# Altium PCB ind_8700.PcbDoc
Units mm, origin at the board's own origin, x right, y up, seen from the top; angles counter-clockwise.
Board outline 67 x 42 mm, 2 copper layers (Top, Bottom); 37 components, 38 nets, 106 pads, 9 vias.
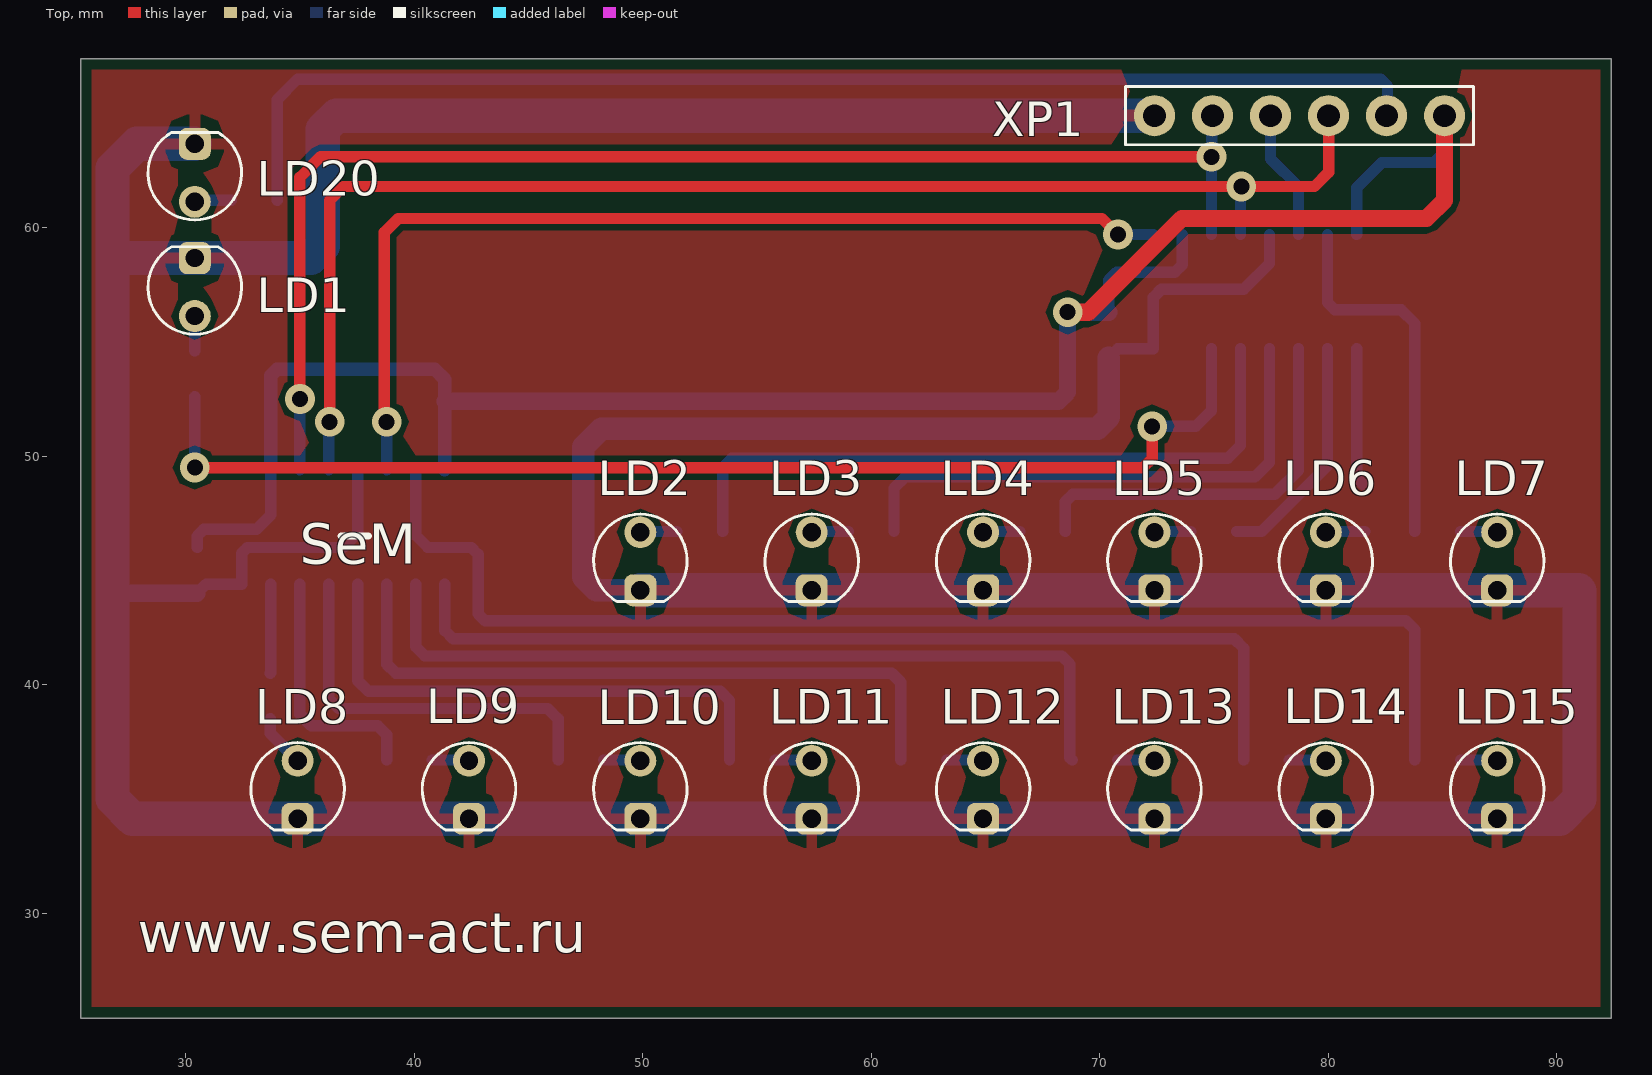
[diagram p0: Top view]
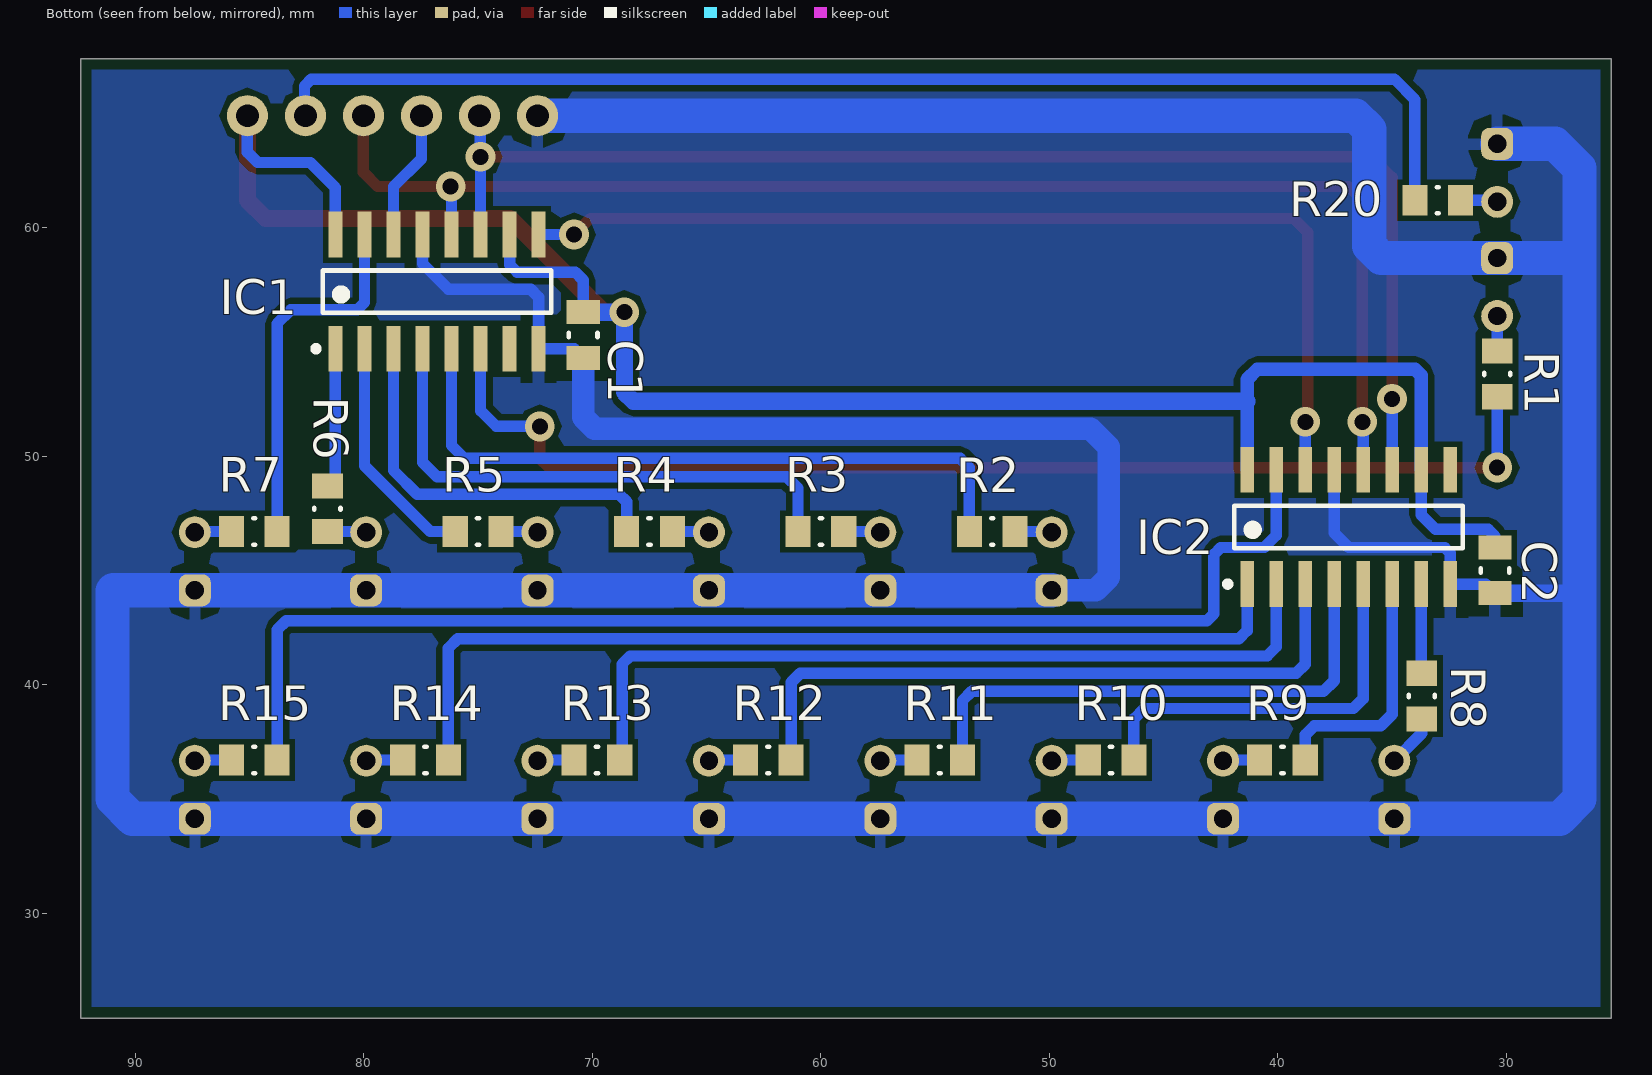
[diagram p1: Bottom view, seen from below]

## Layer stack, top to bottom
Top Solder: solder mask 0.0102, Solder Resist, Dk 3.5
Top: signal copper 0.0356
Dielectric 1: dielectric 0.32, FR-4, Dk 4.8
Bottom: signal copper 0.0356
Bottom Solder: solder mask 0.0102, Solder Resist, Dk 3.5

## Board outline
25.4,25.4 92.4,25.4 92.4,67.4 25.4,67.4

## Design rules (kind name [scope] priority, off if disabled: settings)
Clearance [All] p1: gap=0.254
PolygonConnect [All] p1: connectstyle=Relief reliefconductorwidth=0.5 reliefentries=4 polygonreliefangle="90 Angle" airgapwidth=0.5
RoutingVias [All] p1: holewidth=0.711 width=1.27 viastyle="Through Hole" minholewidth=0.711 minwidth=1.27 maxholewidth=0.711 maxwidth=1.27
SolderMaskExpansion [All] p1: expansion=0.102
Width [All] p1: maxlimit=1.5 minlimit=0.254 preferedwidth=0.5
29 further rules are at their usual default settings.

## Components (designator, comment, footprint, x,y, rotation, side; value= is the part's Value field where it differs from the comment)
C1 "0.1" CAPC2113X13N_0805 70.4,55.3 r90 bottom
C2 "0.1" CAPC2113X13N_0805 30.5,45 r90 bottom
IC1 "74HC595" SOIC_16_74hc 76.8,57.2 r90 bottom
IC2 "74HC595" SOIC_16_74hc 36.9,46.9 r90 bottom
LD1 "Red" LED_3 30.4,57.4 r90 top
LD2 "Green" LED_3 49.9,45.4 r270 top
LD3 "Green" LED_3 57.4,45.4 r270 top
LD4 "Green" LED_3 64.9,45.4 r270 top
LD5 "Green" LED_3 72.4,45.4 r270 top
LD6 "Green" LED_3 79.9,45.4 r270 top
LD7 "Green" LED_3 87.4,45.4 r270 top
LD8 "Yell" LED_3 34.9,35.4 r270 top
LD9 "Yell" LED_3 42.4,35.4 r270 top
LD10 "Yell" LED_3 49.9,35.4 r270 top
LD11 "Yell" LED_3 57.4,35.4 r270 top
LD12 "Yell" LED_3 64.9,35.4 r270 top
LD13 "Yell" LED_3 72.4,35.4 r270 top
LD14 "Yell" LED_3 79.9,35.4 r270 top
LD15 "Yell" LED_3 87.4,35.4 r270 top
LD20 "Green" LED_3 30.4,62.4 r90 top
R1 "1k" RESC2113X0805N 30.4,53.6 r270 bottom
R2 "1k" RESC2113X0805N 52.5,46.7 r0 bottom
R3 "1k" RESC2113X0805N 60,46.7 r0 bottom
R4 "1k" RESC2113X0805N 67.5,46.7 r0 bottom
R5 "1k" RESC2113X0805N 75,46.7 r0 bottom
R6 "1k" RESC2113X0805N 81.6,47.7 r90 bottom
R7 "1k" RESC2113X0805N 84.8,46.7 r180 bottom
R8 "1k" RESC2113X0805N 33.7,39.5 r90 bottom
R9 "1k" RESC2113X0805N 39.8,36.7 r180 bottom
R10 "1k" RESC2113X0805N 47.3,36.7 r180 bottom
R11 "1k" RESC2113X0805N 54.8,36.7 r180 bottom
R12 "1k" RESC2113X0805N 62.3,36.7 r180 bottom
R13 "1k" RESC2113X0805N 69.8,36.7 r180 bottom
R14 "1k" RESC2113X0805N 77.3,36.7 r180 bottom
R15 "1k" RESC2113X0805N 84.8,36.7 r180 bottom
R20 "1k" RESC2113X0805N 33,61.2 r0 bottom
XP1 "XP6x1" Connect6_1 72.4,64.9 r270 top

## Footprints (in the part's own frame and the unit in brackets; to place one, negate y for a bottom-side part, rotate by r counter-clockwise, add the part's x,y. Pads: shape width x height; smd on the part's side, far side on the other; paste and mask are expansions set on the pad)
CAPC2113X13N_0805 [mm] "Chip Capacitor, 2-Leads, Body 2.10x1.30mm, IPC Medium Density"
  rect 1.05x1.45 smd: 1(-1,0) 2(1,0)
  silkscreen extent -0.1,-0.63 0.1,0.63, body extent -1.1,-0.7 1.1,0.7, height 1.3
Connect6_1 [mm]
  round 1.8 hole 1: 1(0,0) 2(0,2.54) 3(0,5.08) 4(0,7.62) 5(0,10.16) 6(0,12.7)
  silkscreen extent -1.27,-1.27 1.27,13.97
LED_3 [mm]
  round 1.4 hole 0.8: 1(-1.27,0)
  rrect50% 1.4x1.4 hole 0.8: 2(1.27,0)
  silkscreen extent -2.06,-2.05 1.77,2.05
RESC2113X0805N [mm] "Chip Resistor, 2-Leads, Body 2.10x1.30mm, IPC Medium Density"
  rect 1.1x1.35 smd: 1(-1,0) 2(1,0)
  silkscreen extent -0.05,-0.58 0.05,0.58, body extent -1.1,-0.7 1.1,0.7, height 0.5
SOIC_16_74hc [mm]
  rect 2x0.6 smd: 1(-2.5,4.445) 2(-2.5,3.175) 3(-2.5,1.905) 4(-2.5,0.635) 5(-2.5,-0.635) 6(-2.5,-1.905) 7(-2.5,-3.175) 8(-2.5,-4.445) 9(2.5,-4.445) 10(2.5,-3.175) 11(2.5,-1.905) 12(2.5,-0.635) 13(2.5,0.635) 14(2.5,1.905) 15(2.5,3.175) 16(2.5,4.445)
  silkscreen extent -2.62,-5 0.92,5.42, body extent -2,-5 2,5, height 1.75

## Part data
C1 C2: library part cap_1
IC1 IC2: library part 74hc595_1
LD1 LD2 LD3 LD4 LD5 LD6 LD7 LD8 LD9 LD10 LD11 LD12 LD13 LD14 LD15 LD20: library part LED_1
R1 R2 R3 R4 R5 R6 R7 R8 R9 R10 R11 R12 R13 R14 R15 R20: library part rez_1
XP1: library part Connect6_1

## Via types
v1: diameter 1.3, hole 0.7, Top to Bottom, tented both sides, 9 vias

## Nets (pads, with @x,y where several pads share a name; then routed paths per layer and width w, separated by ;. In a path a pad name is that pad's centre, name@x,y a point inside that pad or via, vN(x,y) a via of type N, cw(c..) or ccw(c..) an arc to the next point about the centre after c; other vN are vias at no path point)
+5V: C1.2 C2.2 IC1.10 IC1.16 IC2.10 IC2.16 XP1.6 | length 91
  Top w0.75: v1(68.6,56.3) 69.5,56.3 73.6,60.4 84.3,60.4 85.1,61.2 XP1.6
  Bottom w0.5: C2.2 30.5,46.5 30.8,46.8 33.1,46.8 33.725,47.425 IC2.10 ; C1.2 70.4,57.7 70.754,58.054 73.3,58.054 73.625,58.379 IC1.10 ; IC1.16 81.245,61.745 82.35,62.85 84.65,62.85 85.1,63.3 XP1.6
  Bottom w0.6: IC2.10 33.725,53.525 34,53.8 40.9,53.8 41.345,53.355 41.345,52.4 IC2.16
  Bottom w0.75: 41.345,52.4 68.2,52.4 68.6,52.8 v1(68.6,56.3) ; v1@69,56.3 C1.2
GND: C1.1 C2.1 IC1.8 IC1.13 IC2.8 IC2.13 LD1.2 LD2.2 LD3.2 LD4.2 LD5.2 LD6.2 LD7.2 LD8.2 LD9.2 LD10.2 LD11.2 LD12.2 LD13.2 LD14.2 LD15.2 LD20.2 XP1.1 | length 259.3
  Bottom w0.5: C2.1 30.9,44.4 IC2.8 32.455,45.755 32.7,46 36.9,46 37.535,46.635 IC2.13 ; C1.1 70.8,54.7 IC1.8 72.355,56.955 72.7,57.3 76.3,57.3 77.435,58.435 IC1.13
  Bottom w0.75: 26.8,43.9 26.9,44 C2.1
  Bottom w1: LD2.2 47.97,44.13 47.4,44.7 47.4,50.4 48.2,51.2 69.9,51.2 70.4,51.7 C1.1
  Bottom w1.5: LD20.2 27.87,63.67 26.8,62.6 26.8,58.6 ; LD2.2 LD3.2 LD4.2 LD5.2 LD6.2 LD7.2 90.97,44.13 91,44.1 91,35 90.13,34.13 LD15.2 LD14.2 LD13.2 LD12.2 LD11.2 LD10.2 LD9.2 LD8.2 27.67,34.13 26.8,35 26.8,43.9 26.8,58.6 ; XP1.1 36.6,64.9 36,64.3 36,59.2 35.47,58.67 LD1.2 26.87,58.67 26.8,58.6
LD: R20.2 XP1.5 | length 54.8
  Bottom w0.5: R20.2 34,65.6 34.9,66.5 82.3,66.5 82.6,66.2 82.6,64.94 XP1.5
MOSI: IC1.14 XP1.3 | length 5.7
  Bottom w0.5: XP1.3 77.48,63.02 78.705,61.795 IC1.14
NetIC1_1: IC1.1 R6.2 | length 6.1
  Bottom w0.5: IC1.1 81.245,49.055 R6.2
NetIC1_2: IC1.2 R5.2 | length 10.3
  Bottom w0.5: R5.2 77.1,46.7 79.975,49.575 IC1.2
NetIC1_3: IC1.3 R4.2 | length 17.4
  Bottom w0.5: R4.2 68.5,48 68.833,48.333 77.667,48.333 78.705,49.371 IC1.3
NetIC1_4: IC1.4 R3.2 | length 23.8
  Bottom w0.5: R3.2 61,48.6 61.5,49.1 76.8,49.1 77.435,49.735 IC1.4
NetIC1_5: IC1.5 R2.2 | length 30.1
  Bottom w0.5: R2.2 53.5,49.5 53.9,49.9 75.6,49.9 76.165,50.465 IC1.5
NetIC1_6: IC1.6 R1.2 | length 52.2
  Top w0.5: v1(30.4,49.5) 71.9,49.5 72.3,49.9 v1(72.3,51.3)
  Bottom w0.5: v1(30.4,49.5) R1.2 ; v1(72.3,51.3) 74.2,51.3 74.895,51.995 IC1.6
NetIC1_9: IC1.9 IC2.14 | length 44.6
  Top w0.5: v1(38.8,51.5) 38.7,51.6 38.7,59.8 39.3,60.4 70.1,60.4 v1(70.8,59.7)
  Bottom w0.5: v1(38.8,51.5) 38.805,51.495 IC2.14 ; v1(70.8,59.7) IC1.9
NetIC1_15: IC1.15 R7.2 | length 16.3
  Bottom w0.5: IC1.15 79.975,56.725 80.3,56.4 83.2,56.4 83.8,55.8 R7.2
NetIC2_1: IC2.1 R14.2 | length 42.2
  Bottom w0.5: IC2.1 41.345,42.363 41.7,42.008 75.892,42.008 76.3,41.6 R14.2
NetIC2_2: IC2.2 R13.2 | length 35.9
  Bottom w0.5: IC2.2 40.075,41.65 40.471,41.254 68.346,41.254 68.7,40.9 68.7,36.8 R13.2
NetIC2_3: IC2.3 R12.2 | length 29.7
  Bottom w0.5: IC2.3 38.805,40.895 39.2,40.5 60.9,40.5 61.3,40.1 R12.2
NetIC2_4: IC2.4 R11.2 | length 23.5
  Bottom w0.5: IC2.4 37.535,40.173 38,39.708 53.392,39.708 53.8,39.3 R11.2
NetIC2_5: IC2.5 R10.2 | length 17.2
  Bottom w0.5: IC2.5 36.265,39.389 36.7,38.954 45.846,38.954 46.3,38.5 R10.2
NetIC2_6: IC2.6 R9.2 | length 11
  Bottom w0.5: IC2.6 34.995,38.705 35.5,38.2 38.4,38.2 38.8,37.8 R9.2
NetIC2_7: IC2.7 R8.2 | length 3.9
  Bottom w0.5: R8.2 33.725,40.525 IC2.7
NetIC2_15: IC2.15 R15.2 | length 55.5
  Bottom w0.5: IC2.15 40.075,46.525 40.6,46 42.5,46 42.8,45.7 42.8,43.1 43.1,42.8 83.4,42.8 83.8,42.4 R15.2
NetLD1_1: LD1.1 R1.1 | length 1.5
  Bottom w0.5: R1.1 LD1.1
NetLD2_1: LD2.1 R2.1 | length 1.7
  Bottom w0.5: LD2.1@49.87,46.7 LD2.1 49.93,46.7 R2.1
NetLD3_1: LD3.1 R3.1 | length 1.7
  Bottom w0.5: LD3.1@57.37,46.7 LD3.1 57.43,46.7 R3.1
NetLD4_1: LD4.1 R4.1 | length 1.7
  Bottom w0.5: LD4.1@64.87,46.7 LD4.1 64.93,46.7 R4.1
NetLD5_1: LD5.1 R5.1 | length 1.7
  Bottom w0.5: LD5.1@72.37,46.7 LD5.1 72.43,46.7 R5.1
NetLD6_1: LD6.1 R6.1 | length 1.8
  Bottom w0.5: LD6.1@79.87,46.7 LD6.1 79.93,46.7 R6.1
NetLD7_1: LD7.1 R7.1 | length 1.6
  Bottom w0.5: R7.1 87.37,46.7 LD7.1
NetLD8_1: LD8.1 R8.1 | length 2.3
  Bottom w0.5: R8.1 33.7,37.87 LD8.1
NetLD9_1: LD9.1 R9.1 | length 1.6
  Bottom w0.5: R9.1 42.37,36.7 LD9.1
NetLD10_1: LD10.1 R10.1 | length 1.6
  Bottom w0.5: R10.1 49.87,36.7 LD10.1
NetLD11_1: LD11.1 R11.1 | length 1.6
  Bottom w0.5: R11.1 57.37,36.7 LD11.1
NetLD12_1: LD12.1 R12.1 | length 1.6
  Bottom w0.5: R12.1 64.87,36.7 LD12.1
NetLD13_1: LD13.1 R13.1 | length 1.6
  Bottom w0.5: R13.1 72.37,36.7 LD13.1
NetLD14_1: LD14.1 R14.1 | length 1.6
  Bottom w0.5: R14.1 79.87,36.7 LD14.1
NetLD15_1: LD15.1 R15.1 | length 1.6
  Bottom w0.5: R15.1 87.37,36.7 LD15.1
NetLD20_1: LD20.1 R20.1 | length 1.6
  Bottom w0.5: LD20.1 30.47,61.2 R20.1
RCK: IC1.12 IC2.12 XP1.4 | length 60.6
  Top w0.5: v1(36.3,51.5) 36.3,61.2 36.9,61.8 v1(76.2,61.8) 79.4,61.8 80.02,62.42 XP1.4
  Bottom w0.5: IC2.12 36.265,51.465 v1(36.3,51.5) ; IC1.12 76.165,61.765 v1(76.2,61.8)
SCLK: IC1.11 IC2.11 XP1.2 | length 58.3
  Top w0.5: v1(35,52.5) 35,62.2 35.9,63.1 v1(74.9,63.1)
  Bottom w0.5: IC2.11 35,49.405 v1(35,52.5) ; IC1.11 74.895,63.095 v1(74.9,63.1) 74.9,64.86 XP1.2
pads on no net: IC1.7 IC2.9

## Polygon pours and split planes (outlines as drawn)
GND on Bottom "Bottom-No Net" (solid, remove dead copper, pour order 2): 25.9,66.9 25.9,25.9 91.9,25.9 91.9,66.9
GND on Top "Bottom-No Net" (solid, remove dead copper, pour order 4): 25.9,66.9 25.9,25.9 91.9,25.9 91.9,66.9

## Silkscreen, mask and mechanical layers (free items; w line width, h text height)
Top Overlay:
  lines w0.3: 36.8,46.5 38,46.5
  text "SeM" at 35,44.7 h3
  text "www.sem-act.ru" at 27.9,27.7 h3
Board:
  the board outline again, w0.127